# EAGLE board OledBoardSchematicV1 (EAGLE 9.5.0)
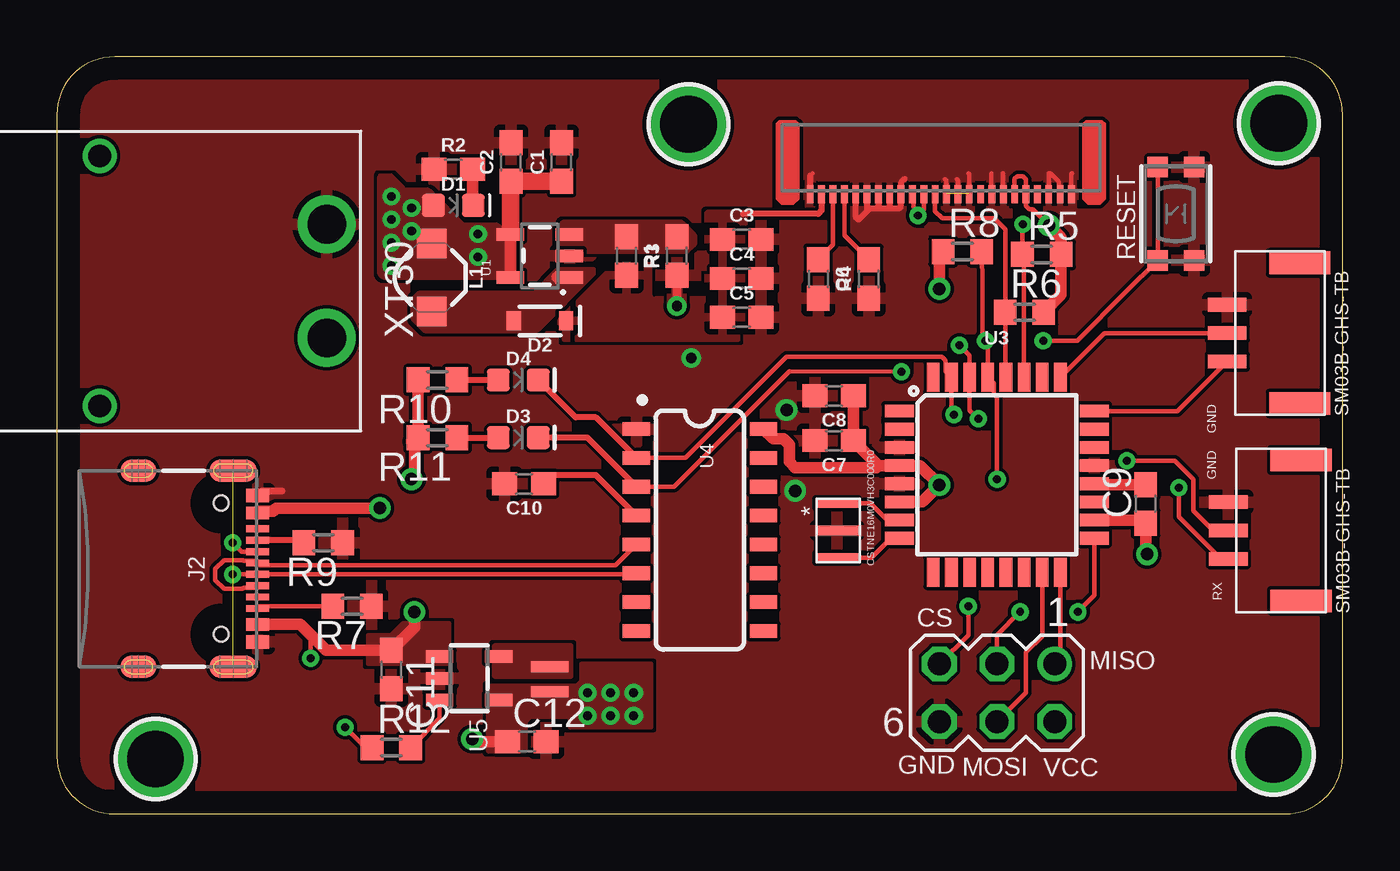
[diagram p0: board, top side]
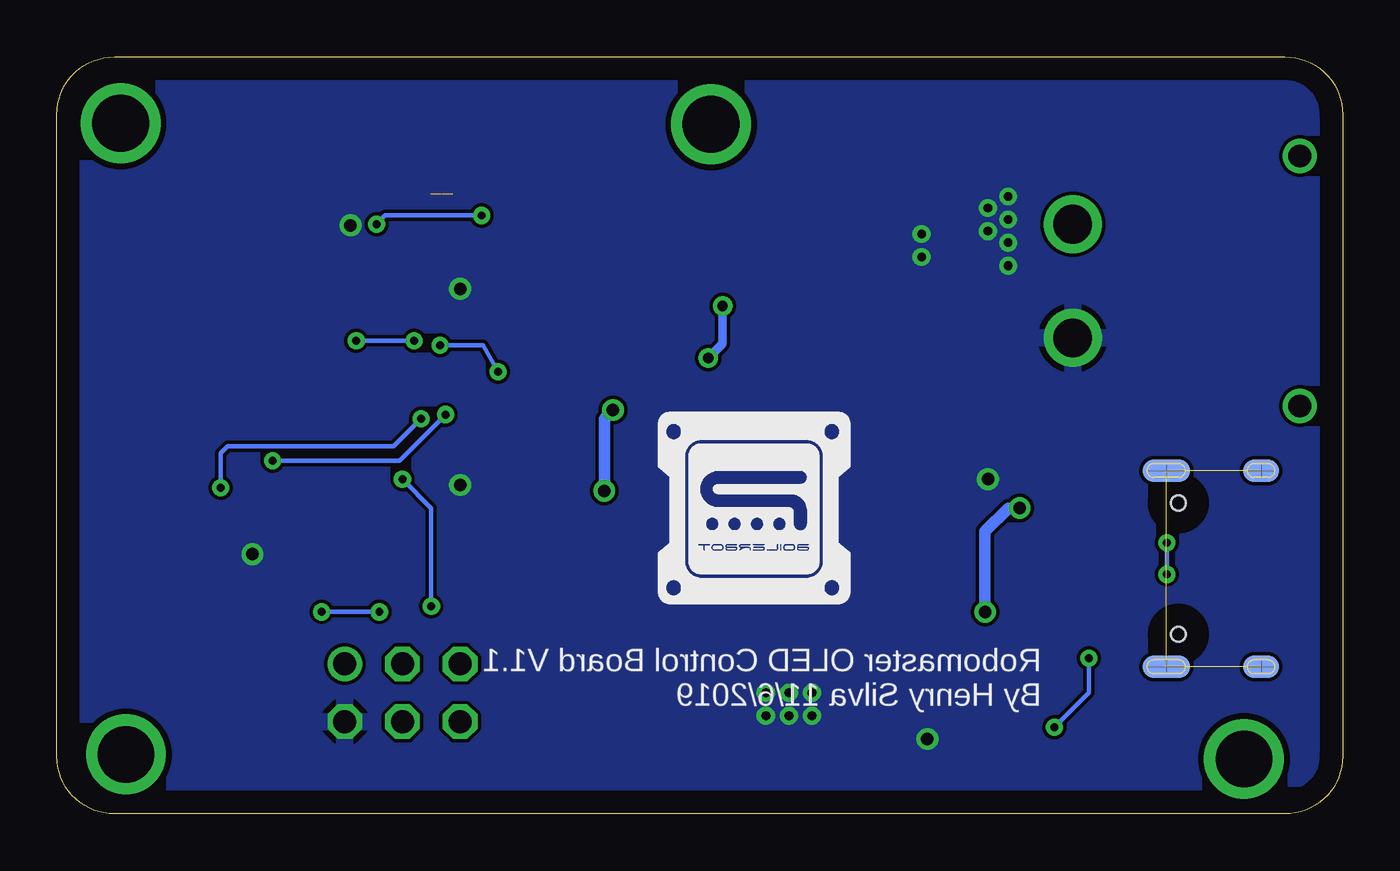
[diagram p1: board, bottom side, seen from below]

Size 56.62 x 33.33 mm. Coordinates in mm from the lower left corner, seen from the top.
Outline: 54.08,33.33 2.54,33.33 arc90 0,30.79 0,2.54 arc90 2.54,0 54.08,0 arc90 56.62,2.54 56.62,30.79 arc90 54.08,33.33
Copper layers (1*16): Top 0.035mm / dielectric 1.5mm / Bottom 0.035mm
Design rules "default *": minimum track width 6mil, minimum drill 0.35mm, track to track 6mil, track to pad 6mil, pad to pad 6mil, via to via 6mil, smd to smd 6mil, copper to edge 40mil, drill to drill 6mil, minimum pad ring 10mil, minimum via ring 8mil, stop-mask expansion 4mil, vias tented up to drill 23mil, thermal gap 10mil
Net classes: 2 Power: width 0.203 mm, drill 0.203 mm, clearance 0.203 mm

## Footprints (pad centres in the part's own frame; a part is rotated, then mirrored left to right if it is on the bottom)
0603 = smd 1.1 x 1: 1 -0.85,0; 2 0.85,0
C0603 = smd 1.1 x 1: 1 -0.85,0; 2 0.85,0
LED-0603 = smd 1 x 1: A -0.877,0; C 0.877,0
SOD-323 = smd 0.63 x 0.83: A 1.15,0; C -1.15,0
USB-C-16P = smd 0.3 x 1.016: A5 -1.25,0.154; A6 -0.25,0.154; A7 0.25,0.154; A8 1.25,0.154; B5 1.75,0.154; B6 0.75,0.154; B7 -0.75,0.154; B8 -1.75,0.154 | smd 0.6 x 1.016: GND -3.225,0.154; GND2 3.225,0.154 | smd 1 x 2.1: SHLD1 -4.32,-0.915; SHLD2 4.32,-0.915 | smd 1 x 2.1 bottom: SHLD3 -4.32,-0.915; SHLD4 4.32,-0.915 | smd 1 x 1.6: SHLD5 -4.32,-5.095; SHLD8 4.32,-5.095 | smd 1 x 1.6 bottom: SHLD6 -4.32,-5.095; SHLD7 4.32,-5.095 | smd 0.55 x 1.016: VBUS1 -2.45,0.154; VBUS2 2.45,0.154 | hole 0.65: -2.89,-1.445; 2.89,-1.445
INDUCTOR_4.7UH = smd 1.3 x 1.3: P$1 -1.5,0; P$2 1.5,0
R0603 = smd 1 x 1.1: 1 -0.85,0; 2 0.85,0
BTN_KMR2_4.6X2.8 = smd 0.9 x 0.9: A 2.05,0.8; A' -2.05,0.8; B 2.05,-0.8; B' -2.05,-0.8
MA03-2 = drill 1.016: 1 -2.54,-1.27 | drill 1.016 octagon: 2 -2.54,1.27; 3 0,-1.27; 4 0,1.27; 5 2.54,-1.27; 6 2.54,1.27
SOT23-5 = smd 0.55 x 1.2: 1 -0.95,-1.3; 2 0,-1.3; 3 0.95,-1.3; 4 0.95,1.3; 5 -0.95,1.3
FPC05024-42201 = smd 0.3 x 0.8: P$1 -5.75,0.4; P$2 -5.25,0.4; P$3 -4.75,0.4; P$4 -4.25,0.4; P$5 -3.75,0.4; P$6 -3.25,0.4; P$7 -2.75,0.4; P$8 -2.25,0.4; P$9 -1.75,0.4; P$10 -1.25,0.4; P$11 -0.75,0.4; P$12 -0.25,0.4; P$13 0.25,0.4; P$14 0.75,0.4; P$15 1.25,0.4; P$16 1.75,0.4; P$17 2.25,0.4; P$18 2.75,0.4; P$19 3.25,0.4; P$20 3.75,0.4; P$21 4.25,0.4; P$22 4.75,0.4; P$23 5.25,0.4; P$24 5.75,0.4
TQFP32-08 = smd 1.27 x 0.559: 1 -4.293,2.8; 2 -4.293,2; 3 -4.293,1.2; 4 -4.293,0.4; 5 -4.293,-0.4; 6 -4.293,-1.2; 7 -4.293,-2; 8 -4.293,-2.8; 17 4.293,-2.8; 18 4.293,-2; 19 4.293,-1.2; 20 4.293,-0.4; 21 4.293,0.4; 22 4.293,1.2; 23 4.293,2; 24 4.293,2.8 | smd 0.559 x 1.27: 9 -2.8,-4.293; 10 -2,-4.293; 11 -1.2,-4.293; 12 -0.4,-4.293; 13 0.4,-4.293; 14 1.2,-4.293; 15 2,-4.293; 16 2.8,-4.293; 25 2.8,4.293; 26 2,4.293; 27 1.2,4.293; 28 0.4,4.293; 29 -0.4,4.293; 30 -1.2,4.293; 31 -2,4.293; 32 -2.8,4.293
SO016 = smd 0.6 x 1.2: 1 -4.445,-2.8; 2 -3.175,-2.8; 3 -1.905,-2.8; 4 -0.635,-2.8; 5 0.635,-2.8; 6 1.905,-2.8; 7 3.175,-2.8; 8 4.445,-2.8; 9 4.445,2.8; 10 3.175,2.8; 11 1.905,2.8; 12 0.635,2.8; 13 -0.635,2.8; 14 -1.905,2.8; 15 -3.175,2.8; 16 -4.445,2.8
MOUNTINGHOLE_2.5_PLATED = drill 2.5 pad 3.2: P$1 0,0
SM03B-GHS-TB = smd 1 x 2.7: P$1 0.5,1.35; P$2 6.7,1.35 | smd 0.6 x 1.7: P$3 2.35,4.55; P$4 3.6,4.55; P$5 4.85,4.55
CSTNE16M0VH3C000R0 = smd 0.4 x 1.9: 1 2.6,1; 2 1.4,1; 3 0.2,1
MDKK1616T2R2MM = smd 0.5 x 1.65: P$1 0,0; P$2 1.1,0
XT30 = drill 1.7: P$1 0,0; P$2 5,0 | drill 1: P$3 -3,10; P$4 8,10

## Placement (x,y rotation side)
C1  0.1uF  [0603]  22.23,28.69 90 top
C2  0.1uF  [0603]  20,28.69 90 top
C3  0.1uF  [0603]  30.16,25.29 0 top
C4  0.1uF  [0603]  30.16,23.57 0 top
C5  0.1uF  [0603]  30.16,21.86 0 top
C6  0.1uF  [0603]  33.53,23.55 270 top
C7  0.1uF  [0603]  34.23,16.43 180 top
C8  0.1uF  [0603]  34.23,18.4 180 top
C9  47uF  [C0603]  47.95,13.65 90 top
C10  10nF  [0603]  20.57,14.53 180 top
C11  10uF  [C0603]  14.73,6.35 270 top
C12  22uF  [C0603]  20.7,3.17 0 top
D1  GREEN  [LED-0603]  17.46,26.78 0 top
D2  1A/23V/620mV  [SOD-323]  21.27,21.7 180 top
D3  GREEN  [LED-0603]  20.32,16.56 0 top
D4  GREEN  [LED-0603]  20.32,19.1 0 top
J2  [USB-C-16P]  8.69,10.79 270 top
L1  4.7µH/±30%/1.2A  [INDUCTOR_4.7UH]  16.51,23.61 270 top
R1  47k  [0603]  25.08,24.56 270 top
R2  1k  [0603]  17.46,28.37 0 top
R3  5.6k  [0603]  27.3,24.56 90 top
R4  100k  [0603]  35.75,23.55 90 top
R5  1K  [R0603]  43.37,24.63 0 top
R6  1k  [R0603]  42.61,22.09 0 top
R7  5.1K  [R0603]  13,9.14 180 top
R8  1K  [R0603]  39.88,24.75 0 top
R9  5.1K  [R0603]  11.73,11.94 180 top
R10  1K  [R0603]  16.76,19.1 180 top
R11  1K  [R0603]  16.76,16.56 180 top
R12  100K  [R0603]  14.73,2.92 0 top
RESET  KMR2  [BTN_KMR2_4.6X2.8]  49.28,26.42 90 top
SV1  [MA03-2]  41.4,5.33 180 top
U1  AP3012  [SOT23-5]  21.27,24.56 90 top
U2  UG-2856KLBAG01_4WSPI  [FPC05024-42201]  38.93,27.67 180 top
U3  ATMEGA328P_TQFP  [TQFP32-08]  41.39,14.93 0 top
U4  CH340C  [SO016]  28.32,12.5 270 top
U5  [SOT23-5]  18.16,5.97 270 top
U$1  MOUNTINGHOLE2.5  [MOUNTINGHOLE_2.5_PLATED]  27.81,30.35 0 top
U$2  MOUNTINGHOLE2.5  [MOUNTINGHOLE_2.5_PLATED]  4.35,2.42 0 top
U$3  MOUNTINGHOLE2.5  [MOUNTINGHOLE_2.5_PLATED]  53.58,2.62 0 top
U$4  MOUNTINGHOLE2.5  [MOUNTINGHOLE_2.5_PLATED]  53.81,30.4 0 top
U$5  SM03B-GHS-TB  [SM03B-GHS-TB]  56.08,17.56 90 top
U$6  CSTNE16M0VH3C000R0  [CSTNE16M0VH3C000R0]  35.36,11.07 90 top
U$7  2.2uH/NRH2412T2R2MNGH  [MDKK1616T2R2MM]  21.72,6.48 270 top
U$8  SM03B-GHS-TB  [SM03B-GHS-TB]  56.13,8.88 90 top
U$9  XT30PW-M  [XT30]  11.89,20.95 90 top

## Library data of the parts
C1-C8 C10 = SparkFun-Capacitors; PROD_ID: CAP-00810
C9 C11 C12 = rcl; SPICEPREFIX: C
D1 = SparkFun-LED
D2 = SparkFun-DiscreteSemi; PROD_ID: DIO-11623
D3 D4 = SparkFun-LED; PROD_ID: DIO-00821
J2 = SparkFun-Connectors; PROD_ID: CONN-14122
L1 = SparkFun-Coils; PROD_ID: NDUC-10146
R1 = SparkFun-Resistors; PROD_ID: RES-07871
R2 = SparkFun-Resistors; PROD_ID: RES-07856
R3 = SparkFun-Resistors; PROD_ID: RES-12378
R4 = SparkFun-Resistors; PROD_ID: RES-07828
R5-R12 = rcl; SPICEPREFIX: R
RESET U5 U$1-U$4 = microbuilder
SV1 = con-lstb; OC_FARNELL: unknown; OC_NEWARK: unknown
U1 = SparkFun-IC-Power; PROD_ID: VREG-13911
U2 = SparkFun-Displays; PROD_ID: CONN-14195
U3 = SparkFun-IC-Microcontroller; PROD_ID: IC-09069
U4 = SparkFun-IC-Comms; PROD_ID: IC-14038
U$5 U$6 U$8 U$9 = oledBoard
U$7 = HenrySilva

## Nets
5V: C11.1 J2.VBUS1 J2.VBUS2 R12.1 U5.1
12V: C3.1 C4.1 C5.1 D2.C R1.2 U2.P$23
AMMO1: U3.25 U$5.P$4
AMMO2: U3.24 U$5.P$3
AMMO3: U3.23
CS: R8.2 RESET.A RESET.A' SV1.5 U3.29
D+: J2.A6 J2.B6 U4.5
D-: J2.A7 J2.B7 U4.6
GND: C1.2 C2.2 C3.2 C4.2 C5.2 C6.2 C7.2 C8.2 C10.2 C11.2 C12.2 J2.GND J2.GND2 R2.1 R3.1 R4.1 R7.1 R9.1 RESET.B RESET.B' SV1.6 U1.2 U2.P$1 U2.P$2 U2.P$3 U2.P$7 U2.P$8 U2.P$10 U2.P$11 U2.P$12 U2.P$16 U2.P$17 U2.P$18 U2.P$19 U2.P$20 U2.P$24 U3.3 U3.5 U3.21 U4.1 U5.2 U$5.P$5 U$6.2 U$8.P$5 U$9.P$2
MISO: SV1.1 U3.16
MOSI: SV1.4 U3.15
N$1: D1.C R2.2
N$2: R1.1 R3.2 U1.3
N$3: C6.1 U2.P$22
N$4: D2.A L1.P$2 U1.1
N$5: R4.2 U2.P$21
N$6: U3.7 U$6.1
N$7: U3.8 U$6.3
N$8: C9.2 U3.20
N$9: C10.1 U4.4
N$10: D4.A R10.1
N$11: J2.A5 R9.2
N$12: J2.B5 R7.2
N$13: D3.A R11.1
N$14: R12.2 U5.3
N$15: U5.5 U$7.P$1
RX: D3.C U3.30 U4.3 U$8.P$3
SCK: SV1.3 U3.17
SCL: R6.1 U2.P$13 U3.28
SDA: R5.1 U2.P$14 U2.P$15 U3.27
SHLD: J2.SHLD1 J2.SHLD2 J2.SHLD3 J2.SHLD4 J2.SHLD5 J2.SHLD6 J2.SHLD7 J2.SHLD8
TX: D4.C U3.31 U4.2 U$8.P$4
VCC: C1.1 C2.1 C7.1 C8.1 C9.1 C12.1 D1.A L1.P$1 R5.2 R6.2 R8.1 R10.2 R11.2 SV1.2 U1.4 U1.5 U2.P$5 U2.P$6 U3.4 U3.6 U3.18 U4.16 U5.4 U$7.P$2 U$9.P$1

## Tracks (layer width: path | path; a pad name or v marks a point on that pad's centre or on a via)
5V  (via drill 0.35, 0.55)
  Top 0.203: R12.1 13.59,2.92 v12.7,3.81 | v11.18,6.86 11.18,7.62 11.3,7.75
  Top 0.508: J2.VBUS1 8.91,13.31 9.52,13.31 9.67,13.46 v14.22,13.46 | v15.75,8.89 15.75,8.22 C11.1 11.85,7.2 11.3,7.75 10.71,8.35 J2.VBUS2
  Bottom 0.203: v12.7,3.81 11.18,5.33 v11.18,6.86
  Bottom 0.508: v14.22,13.46 14.73,13.46 15.75,12.45 v15.75,8.89
  pour Top (no thermals): 17.27,6.6 13.72,6.6 13.72,7.87 14.73,7.87 15.24,8.38 17.27,8.38
12V
  Top 0.254: 30.23,26.42 33.53,26.42 33.67,26.56 U2.P$23 | 29.31,25.5 C3.1
  pour Top: 24.64,24.13 22.23,21.72 22.23,21.08 22.35,20.95 29.97,20.95 30.23,21.21 30.23,26.42 28.7,26.42 28.7,22.73 28.57,22.61 26.42,22.61 26.29,22.48 26.04,22.73 26.04,24.13
AMMO1
  Top 0.203: U$5.P$4 46.13,21.16 U3.25
AMMO2
  Top 0.203: U$5.P$3 49.35,17.73 U3.24
CS  (via drill 0.35)
  Top 0.203: R8.2 40.77,23.27 40.77,20.95 v40.89,20.83 40.99,20.73 U3.29 41.26,18.96 41.26,18.48 41.4,18.34 v41.4,14.73 | v43.43,20.83 44.94,20.83 47.08,22.97 RESET.A' RESET.A | SV1.5 40.13,7.87 v40.13,9.14
  Bottom 0.203: v43.43,20.83 v40.89,20.83 | v40.13,9.14 40.13,13.46 v41.4,14.73
D+
  Top 0.203: J2.B6 8.75,9.95 8.23,9.95 8.19,9.91 7.37,9.91 6.99,10.29 6.99,10.79 7.37,11.18 8.19,11.18 8.23,11.14 8.75,11.14 J2.A6 8.94,10.95 24.61,10.95 U4.5
D-  (via drill 0.35)
  Top 0.203: v7.75,10.54 J2.A7 25.47,10.54 U4.6 | J2.B7 8.14,11.54 v7.75,11.94
  Bottom 0.203: v7.75,11.94 v7.75,10.54
GND  (via drill 0.45, 0.55)  (2 unrouted)
  Top 0.203: U2.P$12 39.17,27.88 39.12,27.94 | U2.P$11 39.67,27.89 39.62,27.94 | U2.P$10 40.17,28.15 40.13,28.19 | U2.P$8 41.15,27.3 41.15,28.19 | U2.P$7 41.66,27.29 41.66,28.19 | U2.P$3 43.68,28.18 43.69,28.19 43.75,28.19 44.13,27.82 44.13,27.32 U2.P$2 | U2.P$1 44.68,28.16 44.7,28.19 | 33.17,28.1 33.27,28.19
  Top 0.254: U2.P$20 35.17,26.29 35.31,26.16 35.67,26.53 | U2.P$19 35.67,26.53 | 36.08,26.65 35.79,26.65 35.67,26.53 | U2.P$18 36.17,26.74 36.08,26.65 | U2.P$17 36.65,27.25 36.65,26.72 36.58,26.65 | 36.58,26.65 36.08,26.65 | 36.58,26.65 37.08,26.65 37.15,26.72 37.15,27.25 U2.P$16 37.2,27.3 37.2,27.83 37.33,27.95 | 39.15,27.3 U2.P$12 39.2,27.3 | 40.15,27.3 U2.P$10 40.2,27.3 | U2.P$3 43.65,27.3 | U2.P$2 44.15,27.3 | 39.65,27.3 U2.P$11 39.7,27.3 | 41.15,27.3 U2.P$8 | 41.65,27.3 U2.P$7 | U2.P$24 33.17,28.1
  Top 0.305: J2.GND 9.04,14.22 9.91,14.22
  Top 0.381: R3.1 v27.3,22.35
  Bottom 0.381: v27.3,22.35 27.3,20.7 v27.94,20.07
  Bottom 0.508: v32.51,14.22 32.51,17.4 v32.13,17.78
  pour Top (rank 2): -2.41,0.64 57.28,0.64 57.28,34.29 -2.41,34.29
MISO
  Top 0.203: SV1.1 44.19,6.85 U3.16
MOSI
  Top 0.203: SV1.4 42.67,5.33 42.67,7.11 43.39,7.83 U3.15
N$1
  Top 0.508: D1.C 18.31,26.81 R2.2
N$2
  Top 0.508: 24.98,25.51 R1.1
  pour Top (no thermals): 22.35,25.91 27.43,25.91 27.94,25.4 27.94,25.15 27.69,24.89 22.61,24.89 22.35,25.15
N$3
  Top 0.203: C6.1 34.17,25.04 U2.P$22
N$4
  Top 0.508: L1.P$2 16.91,21.7 | 22.03,23.61 U1.1
  pour Top (no thermals): 16,22.86 21.08,22.86 22.1,23.88 23.62,23.88 21.08,21.34 16.26,21.34 15.75,21.84 15.75,22.61
N$5
  Top 0.203: R4.2 34.67,25.47 U2.P$21
N$6
  Top 0.203: U$6.1 35.83,13.67 36.57,12.93 U3.7
N$7
  Top 0.203: U$6.3 35.88,11.27 36.74,12.13 U3.8
N$8
  Top 0.203: 45.72,14.5 U3.20
  Top 0.508: C9.2 45.72,14.5
N$9
  Top 0.254: C10.1 21.8,14.91 23.74,14.91 U4.4
N$10
  Top 0.254: R10.1 D4.A
N$11
  Top 0.254: R9.2 10.78,12.04 J2.A5
N$12
  Top 0.203: R7.2 9.46,9.14 9.45,9.14 8.94,9.14 J2.B5
N$13
  Top 0.254: R11.1 D3.A
N$14
  Top 0.203: R12.2 16.86,4.2 U5.3
N$15
  pour Top (no thermals): 19.3,6.1 22.61,6.1 22.61,7.37 19.3,7.37
RX  (via drill 0.35)
  Top 0.203: U4.3 27.18,14.4 32.26,19.48 v37.19,19.46 | v39.75,20.62 40.19,20.18 U3.30 40.19,17.78 v40.58,17.39 | U$8.P$3 51.26,11.23 49.4,13.08 v49.4,14.35
  Top 0.254: U4.3 23.36,16.56 D3.C
  Bottom 0.203: v37.19,19.46 37.85,20.62 v39.75,20.62 | v40.58,17.39 41.79,16.18 49.1,16.18 49.4,15.88 v49.4,14.35
SCK  (via drill 0.35)
  Top 0.203: SV1.3 41.4,7.87 v42.42,8.89 | v44.96,8.89 45.68,9.62 U3.17
  Bottom 0.203: v42.42,8.89 v44.96,8.89
SCL
  Top 0.203: U3.28 41.76,19.26 R6.1 41.76,25.73 41.28,26.21 38.99,26.21 38.67,26.53 U2.P$13
SDA  (via drill 0.35)
  Top 0.203: U3.27 42.59,24.55 R5.1 42.52,25.98 v42.55,25.96 | U2.P$14 38.17,26.6 v37.92,26.34 37.92,26.54 37.72,26.73 37.72,27.22 U2.P$15
  Bottom 0.203: v42.55,25.96 42.16,26.34 v37.92,26.34
SHLD  (7 unrouted)
TX  (via drill 0.35)
  Top 0.203: U4.2 27.69,15.67 32.13,20.11 38.98,20.11 39.12,19.96 39.12,19.49 U3.31 39.39,17.68 v39.5,17.58 | U$8.P$4 50.9,12.48 50.04,13.33 50.04,14.73 49.22,15.54 v47.12,15.54
  Top 0.254: U4.2 23.74,17.45 22.85,17.45 D4.C
  Bottom 0.203: v47.12,15.54 41.53,15.54 v39.5,17.58
VCC  (via drill 0.38, 0.4, 0.55)
  Top 0.203: v43.69,25.91 42.98,26.62 42.84,26.62 42.67,26.78 U2.P$5 42.63,27.32 42.67,27.37 42.67,27.94 42.55,28.07 42.29,28.07 42.17,27.95 U2.P$6
  Top 0.508: v48.01,11.43 47.95,11.49 C9.1 47.81,12.93 U3.18 | U3.6 38.12,13.73 v38.86,14.48 38.01,15.33 U3.4 36.18,15.33 | 36.18,15.33 C7.1 C8.1 | 36.18,15.33 36.09,15.24 32.51,15.24 32.26,15.49 32.26,16.26 32,16.51 31.55,16.51 U4.16 | v15.62,14.73 15.75,14.86 15.75,16.39 | R11.2 R10.2 | v43.69,25.91 44.22,25.38 R5.2 44.22,22.85 R6.2 | v38.86,23.11 38.86,24.59 R8.1 | U1.4 U1.5 | C12.1 18.41,3.17 v18.29,3.3
  Top 0.762: 15.75,16.39 R11.2 | U1.4 19.97,27.81 C2.1 C1.1
  other vias: 18.54,25.53 18.54,24.51 14.73,27.18 14.73,26.16 14.73,25.15 14.73,24.13 15.62,26.67 15.62,25.65 23.37,5.33 24.38,5.33 24.38,4.32 23.37,4.32 25.4,4.32 25.4,5.33
  pour Bottom: -1.78,1.27 57.91,1.27 57.91,34.29 -1.78,34.29
  pour Top (no thermals): 14.48,27.94 14.48,23.88 19.3,23.88 19.81,24.38 19.81,25.15 19.3,25.65 17.78,25.65 16.26,27.18 14.99,27.18 14.99,27.43
  pour Top (no thermals): 19.05,5.59 24.64,5.59 24.64,4.32 20.83,4.32 20.57,4.06 20.57,2.79 19.05,2.79
  pour Top (no thermals): 22.61,3.81 26.16,3.81 26.16,6.6 23.11,6.6 23.11,5.84 22.61,5.33

## Text on the board
tNames: GND | GND | RX | CS | MISO | GND | MOSI | VCC
bNames: Robomaster OLED Control Board V1.1 / By Henry Silva 11/6/2019